# Altium PCB logi-cam-mt9v.PcbDoc
Units mil, origin at the board's own origin, x right, y up, seen from the top; angles counter-clockwise.
Board outline 1752 x 1238 mil, 4 copper layers (Top Layer, GND, VDD, Bottom Layer), stack 33.234 mil thick; 44 components, 39 nets, 162 pads, 131 vias.
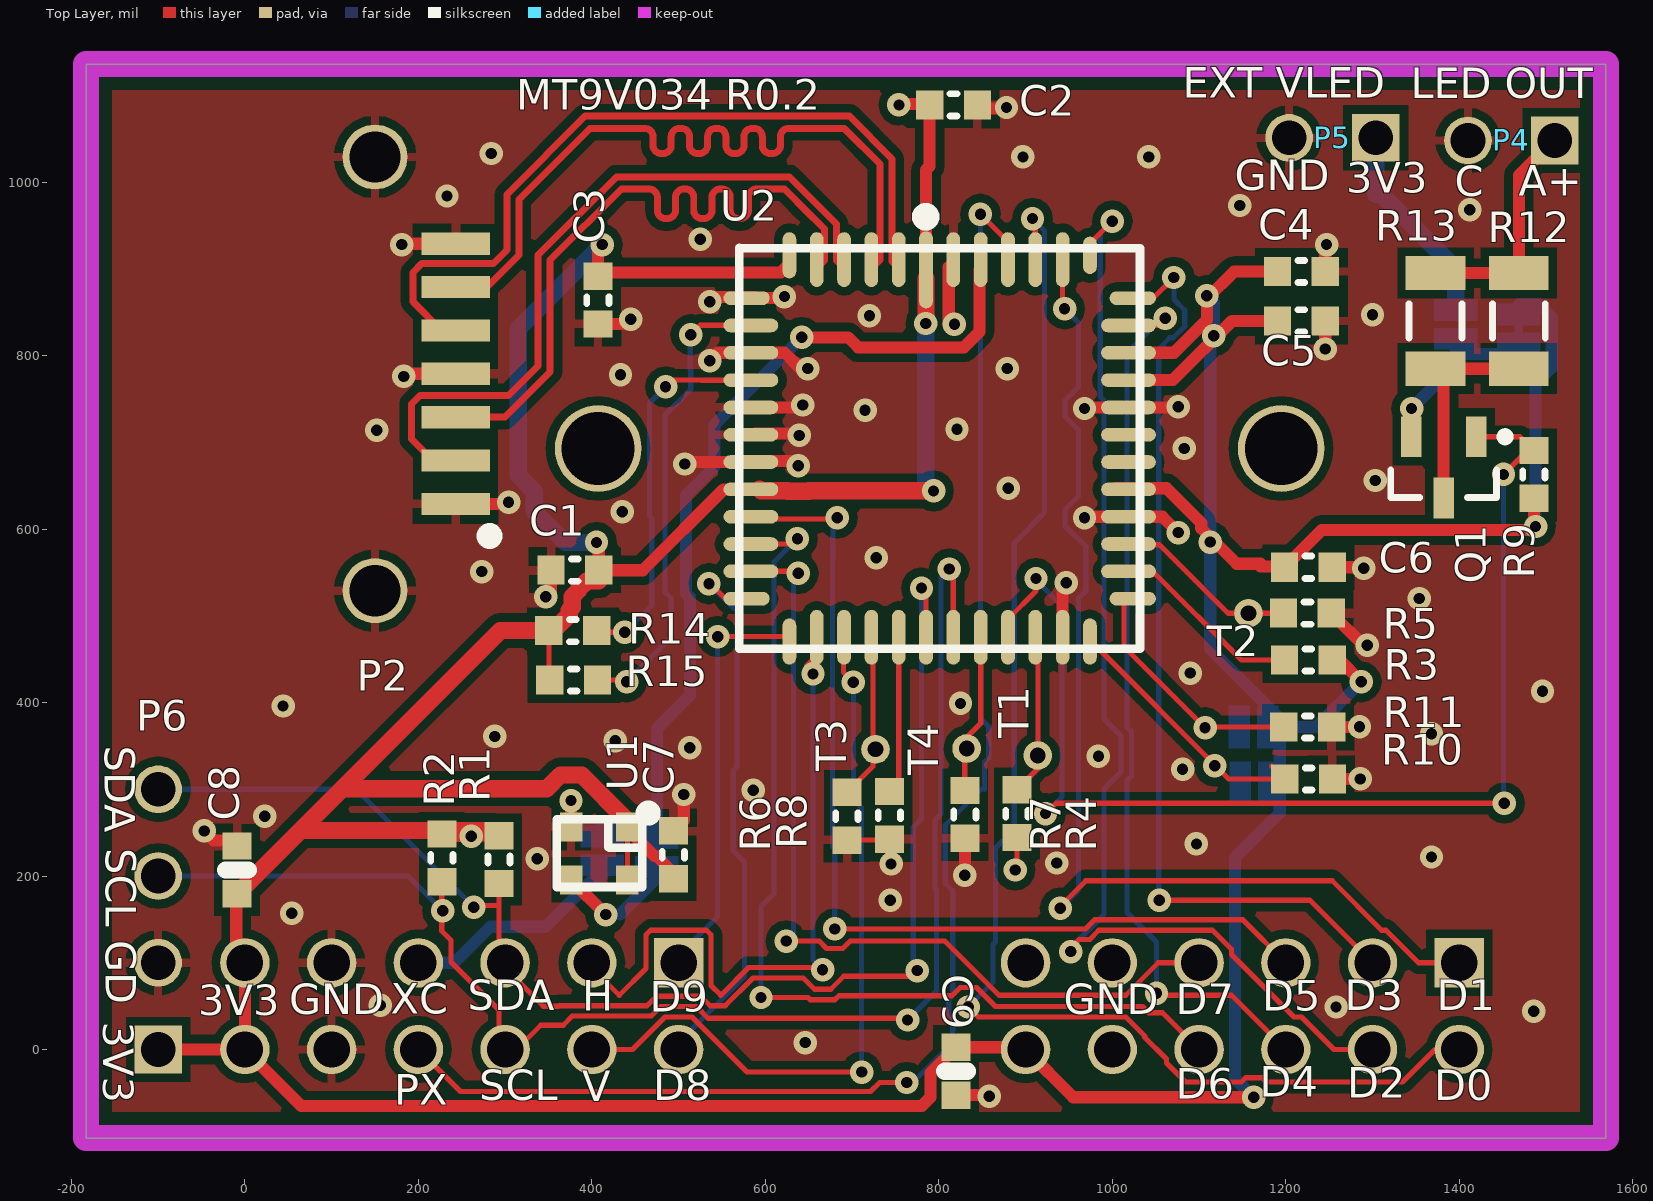
[diagram p0: Top Layer view]
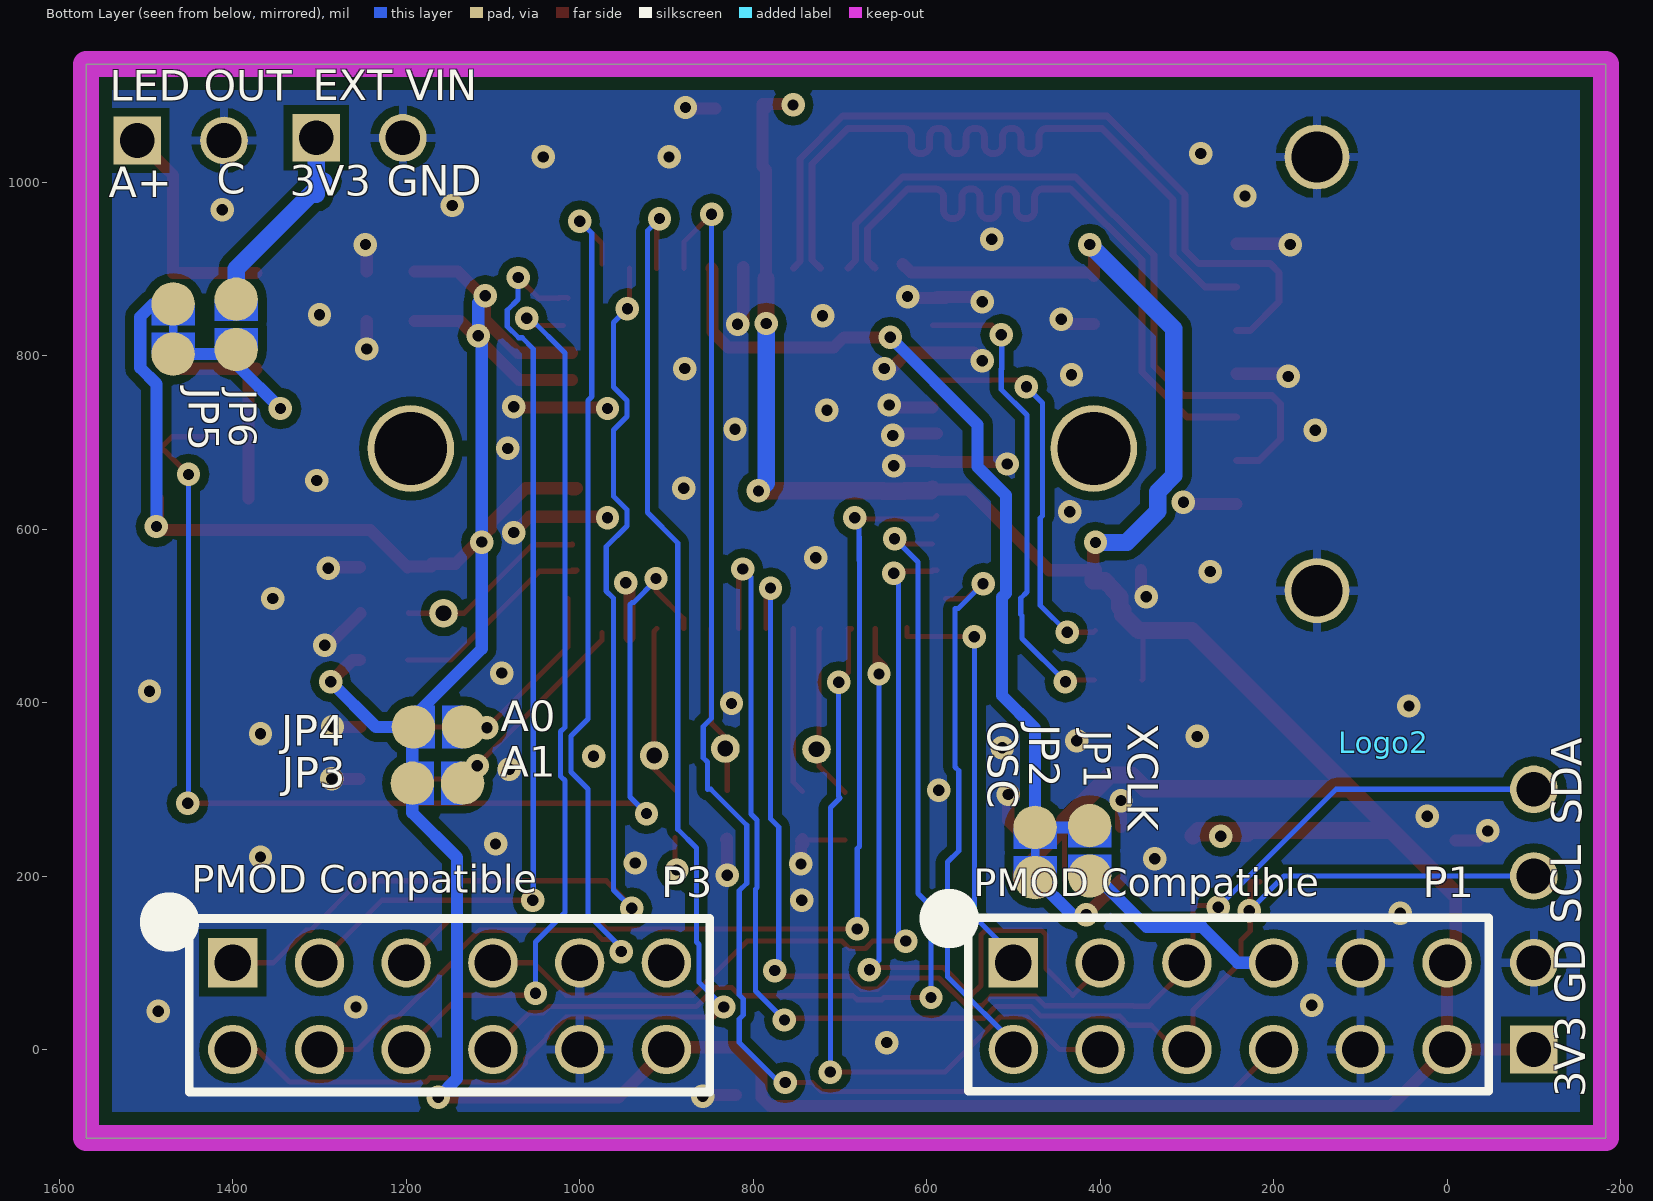
[diagram p1: Bottom Layer view, seen from below]
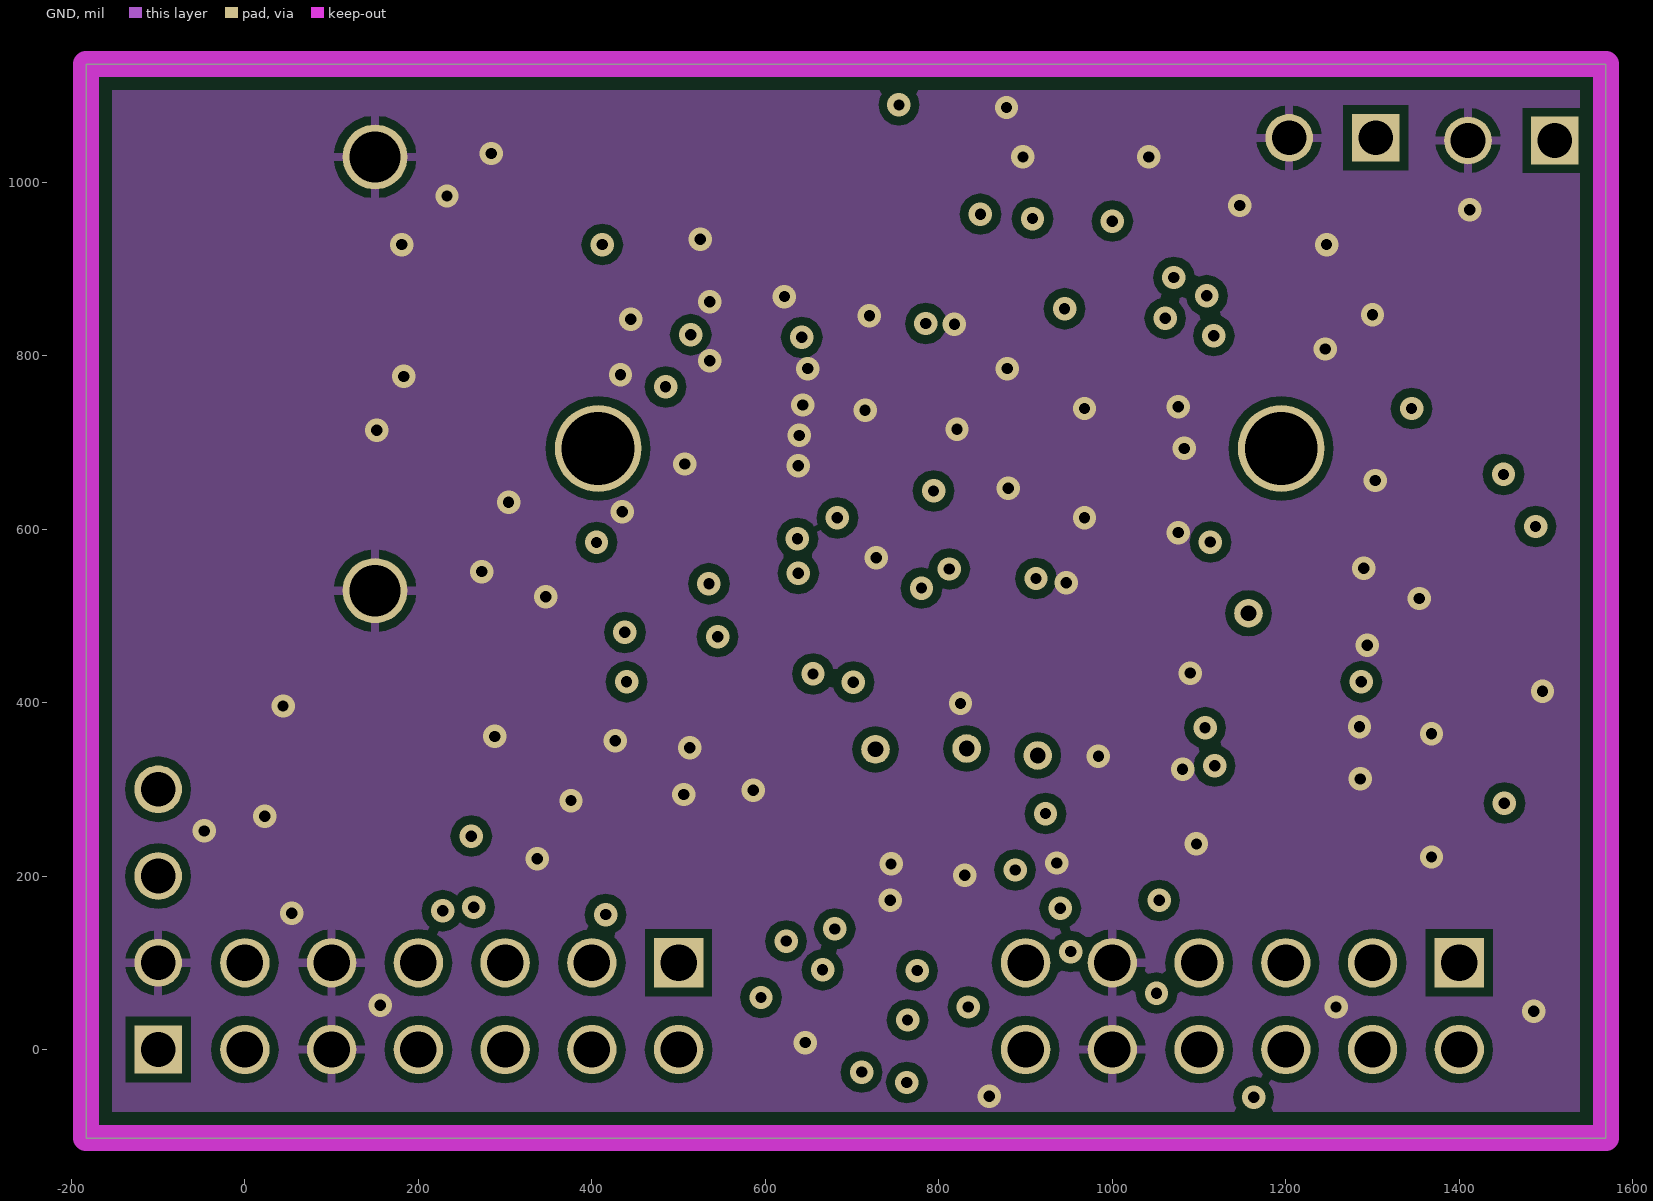
[diagram p2: GND]
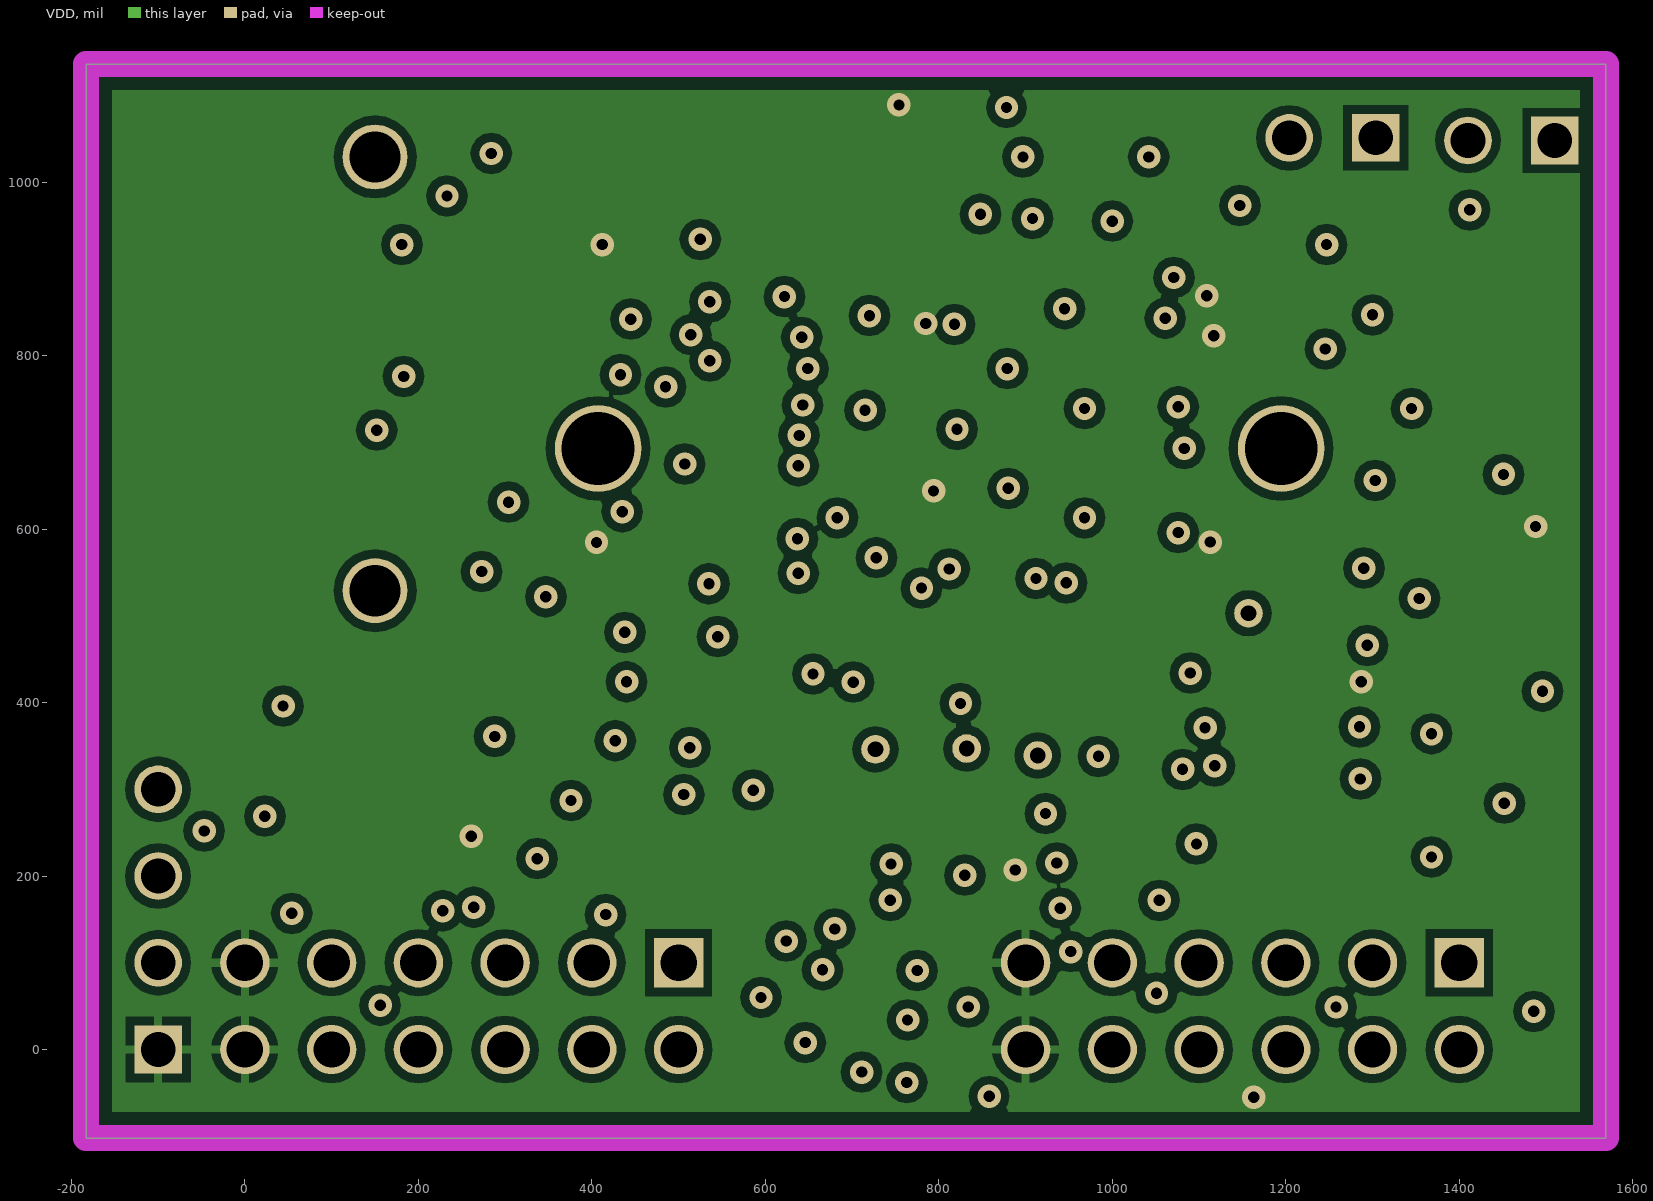
[diagram p3: VDD]
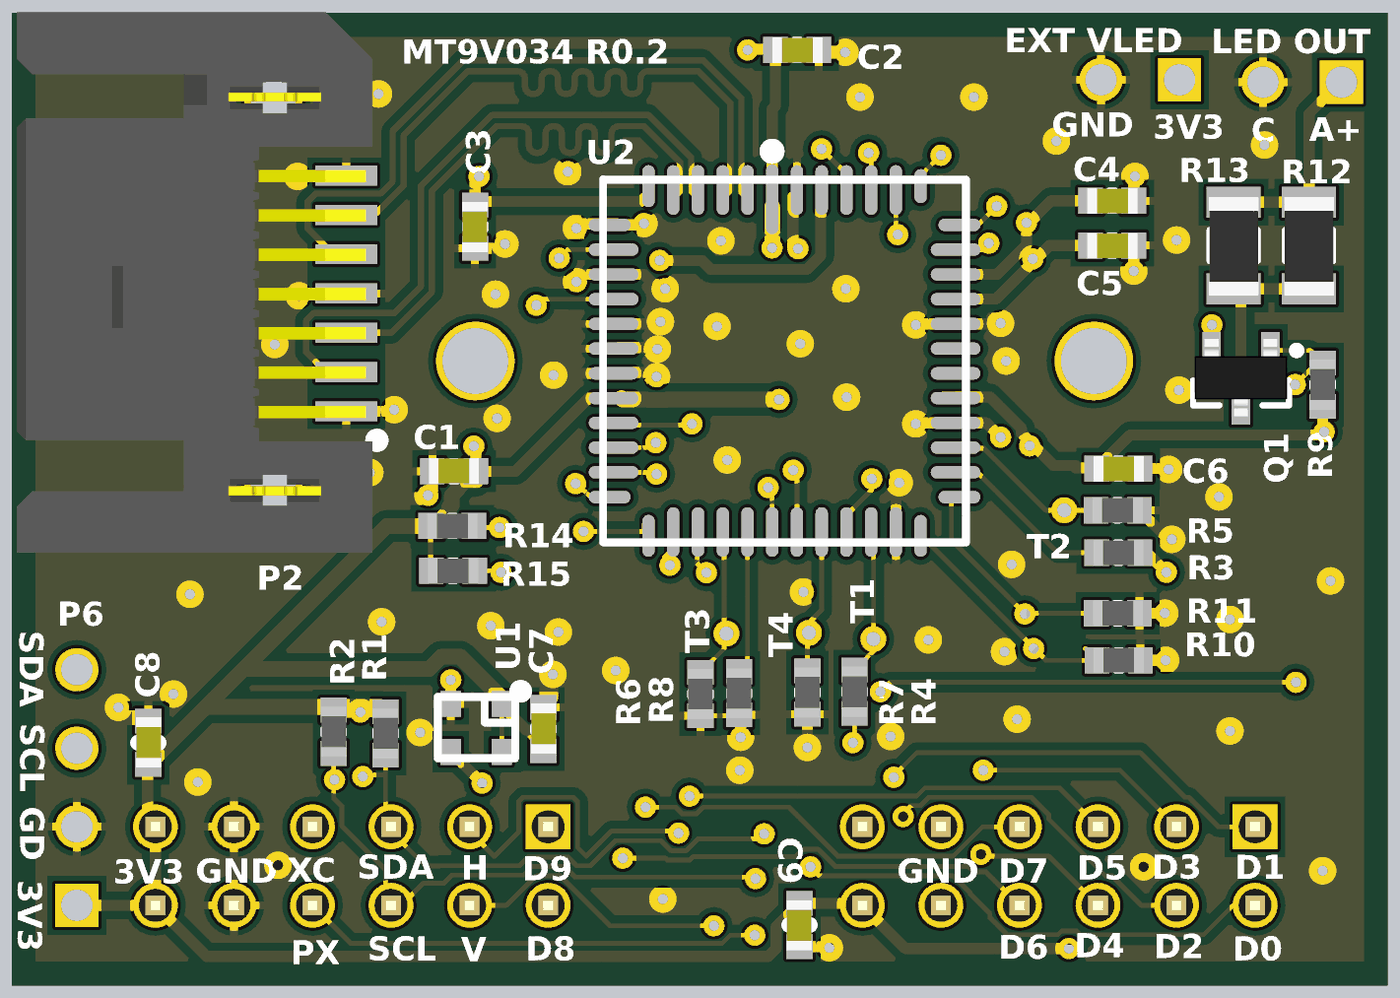
[diagram p4: 3D render of the assembled board from above, using the file's embedded part models]

## Layer stack, top to bottom
Top Solder: solder mask 0.4, Solder Resist, Dk 3.5
Top Layer: signal copper 1.4
Dielectric1: core 12.6, FR-4, Dk 4.8
GND: signal copper 1.417
Dielectric2: prepreg 5, Dk 4.2
VDD: signal copper 1.417
Dielectric3: core 10, Dk 4.2
Bottom Layer: signal copper 1.4
Bottom Solder: solder mask 0.4, Solder Resist, Dk 3.5

## Board outline
-183,-102 1569,-102 1569,1136 -183,1136

## Design rules (kind name [scope] priority, off if disabled: settings)
Clearance Keepout [onlayer('keep-out layer')] p1: gap=15
Clearance POLY_IN_BGA [(WithinRoom('BGA_INNER'))] p2: gap=6
Clearance POLY_TO_POLY [inpoly] p3: gap=10
Clearance [All] p4: gap=6
ComponentClearance [All] p1: gap=0 collisioncheckmode=3 verticalgap=0 showdistances=FALSE
DiffPairsRouting [All] p1: maxlimit=10 minlimit=6 mostfreqgap=6 toplayer_minwidth=6 toplayer_maxwidth=15 toplayer_prefwidth=8 midlayer1_minwidth=6 midlayer1_maxwidth=15 midlayer1_prefwidth=8 midlayer2_minwidth=6 midlayer2_maxwidth=15 midlayer2_prefwidth=8 bottomlayer_minwidth=6 bottomlayer_maxwidth=15 bottomlayer_prefwidth=8 maxuncoupledlength=500
FabricationTestPointUsage TestPointUsage [All] p1: valid=0 allowmultiple=FALSE
FabricationTestpoint Testpoint [All] p1: side=3 testpointundercomponent=TRUE minsize=40 maxsize=100 preferedsize=60 minholesize=0 maxholesize=40 preferedholesize=32 testpointgrid=1 allowsidetop=TRUE allowsidebottom=TRUE usegrid=TRUE gridtolerance=0.01
PlaneClearance [All] p1: clearance=10
PolygonConnect POLY_Q [(ObjectKind = 'Poly') And (Name = 'Q_POUR')] p1: connectstyle=Direct reliefconductorwidth=10 reliefentries=4 polygonreliefangle="90 Angle" airgapwidth=10
PolygonConnect "via connect" [isvia] p2: connectstyle=Direct reliefconductorwidth=10 reliefentries=4 polygonreliefangle="90 Angle" airgapwidth=10
PolygonConnect [All] p3: connectstyle=Relief reliefconductorwidth=10 reliefentries=4 polygonreliefangle="90 Angle" airgapwidth=10
RoutingVias [All] p1: holewidth=13 width=27 viastyle="Through Hole" minholewidth=13 minwidth=27 maxholewidth=28 maxwidth=50
SilkToSolderMaskClearance SilkscreenOverComponentPads [IsPad] p1: minsilkscreentomaskgap=10 clearancetoexposedcopper=TRUE
SolderMaskExpansion VIA [isvia and not(locked)] p1: expansion=-100
SolderMaskExpansion SolderMaskExpansion_1 [All] p2: expansion=4
UnpouredPolygon [All] p1: allowunpoured=FALSE
Width [All] p1: maxlimit=20 minlimit=6 preferedwidth=14
23 further rules are at their usual default settings.

## Classes and differential pairs
differential pair LVDS_COUT: +LVDS_COUT_P -LVDS_COUT_N
differential pair LVDS_DOUT: +LVDS_DOUT_P -LVDS_DOUT_N

## Components (designator, comment, footprint, x,y, rotation, side; value= is the part's Value field where it differs from the comment)
C1 ".1uF" C0603 380.39,552.61 r180 top
C2 ".1uF" C0603 817,1089 r0 top
C3 ".1uF" C0603 407,864 r270 top
C4 ".1uF" C0603 1218,897 r0 top
C5 ".1uF" C0603 1218,840 r0 top
C6 ".1uF" C0603 1226,556 r0 top
C7 ".1uF" C0603 493.96,224.5 r90 top
C8 "4.7uF" "C0603 - Marked" -9,207 r90 top
C9 "4.7uF" "C0603 - Marked" 820,-25 r270 top
JP1 "Solder Jumper" SOLDER_JUMPER 412.01,200.09 r270 bottom
JP2 "Solder Jumper-NC" SOLDER_JUMPER-NC 475.01,198.09 r270 bottom net-tie
JP3 "Solder Jumper" SOLDER_JUMPER 1135,307 r180 bottom
JP4 "Solder Jumper" SOLDER_JUMPER 1133.81,371.86 r180 bottom
JP5 "Solder Jumper-NC" SOLDER_JUMPER-NC 1468.69,859.69 r90 bottom net-tie
JP6 "Solder Jumper" SOLDER_JUMPER 1396,865 r90 bottom
Logo2 "Valent Logo 750" VALENTFX_750-SOLDERMASK-BOT 73,354 r270 bottom
P1 "2X6 .1\" HEADER MALE" "PMOD HEADER - Male Vertical" 500,100 r0 bottom locked
P2 "SATA - 67490-1220" "SATA - 67490-3220" 243,629 r270 top
P3 "2X6 .1\" HEADER MALE" "PMOD HEADER - Male Vertical" 1400,100 r0 bottom
P4 "Header2" "HEADER_2_40_100 THRU SIP" 1510,1048 r180 top
P5 "Header2" "HEADER_2_40_100 THRU SIP" 1303.83,1051 r180 top
P6 "Header4" "HEADER_4_40_100 THRU SIP - duplicate" -100,0 r90 top
Q1 "Si2347DS-T1-GE3" sot-23 1382,671 r270 top
R1 "10k" R0603 293,219 r270 top
R2 "10k" R0603 227,221 r270 top
R3 "10k" R0603 1226,449 r180 top
R4 "10k" R0603 890,272 r90 top
R5 "10k" R0603 1225,503 r180 top
R6 "10k" R0603 694,269 r90 top
R7 "10k" R0603 830,271 r90 top
R8 "10k" R0603 743,270 r90 top
R9 "10k" R0603 1486,663 r270 top
R10 "10k" R0603 1226.37,311.86 r0 top
R11 "10k" R0603 1225.37,371.86 r0 top
R12 "10/1206" R1206 1468.69,840 r90 top
R13 "10/1206" R1206 1372.69,840 r90 top
R14 "10k" R0603 378,483 r180 top
R15 "10k" R0603 379,426 r180 top
T1 "Test Point" "Tp 18-33" 914,339 r0 top
T2 "Test Point" "Tp 18-33" 1157,503 r0 top
T3 "Test Point" "Tp 18-33" 727,346 r90 top
T4 "Test Point" "Tp 18-33" 832,347 r0 top
U1 "ASDMB-50.000MHZ-LC-T" "ASDMB - osc" 440.96,256.5 r180 top
U2 "CAM - MT9V034" "CAM - MT9V034 - easier" 801,693 r0 top locked

## Footprints (in the part's own frame and the unit in brackets; to place one, negate y for a bottom-side part, rotate by r counter-clockwise, add the part's x,y. Pads: shape width x height; smd on the part's side, far side on the other; paste and mask are expansions set on the pad)
"ASDMB - osc" [mil] "oscillator ASDMB - osc footprint"
  rect 26x33 smd: 1(0,0) 2(64.96,0) 3(64.96,61.02) 4(0,61.02)
  silkscreen extent -26,-18 81,69, body extent -17,-9 81,69, height 30
C0603 [mm] "0603 Generic"
  rect 0.8x0.85 smd: 1(-0.7,0) 2(0.7,0)
  silkscreen extent -0.1,-0.33 0.1,0.33, body extent -0.8,-0.42 0.82,0.4, height 0.46
"C0603 - Marked" [mm] "0603 Generic"
  rect 0.8x0.85 smd: 1(-0.7,0) 2(0.7,0)
  silkscreen extent 0,-0.33 0,0.33, body extent -0.8,-0.42 0.82,0.4, height 0.46
"CAM - MT9V034 - easier" [mm] "QFN, 48-Leads, Body 11.43x11.43mm, Pitch 0.80mm, IPC High Density"
  oval 0.4x2.254 smd: 1(-0.4,5.229)
  oval 0.4x1.604 smd: 2(-1.2,5.529) 3(-2,5.529) 4(-2.8,5.529) 5(-3.6,5.529) 20(-3.6,-5.529) 21(-2.8,-5.529) 22(-2,-5.529) 23(-1.2,-5.529) 24(-0.4,-5.529) 25(0.4,-5.529) 26(1.2,-5.529) 27(2,-5.529) 28(2.8,-5.529) 29(3.6,-5.529) 44(3.6,5.529) 45(2.8,5.529) 46(2,5.529) 47(1.2,5.529) 48(0.4,5.529)
  oval 0.4x1.354 smd: 6(-4.4,5.654) 19(-4.4,-5.654) 30(4.4,-5.654)
  oval 1.354x0.4 smd: 7(-5.654,4.4) 18(-5.654,-4.4) 31(5.654,-4.4) 42(5.654,4.4)
  oval 1.604x0.4 smd: 8(-5.529,3.6) 9(-5.529,2.8) 10(-5.529,2) 11(-5.529,1.2) 12(-5.529,0.4) 13(-5.529,-0.4) 14(-5.529,-1.2) 15(-5.529,-2) 16(-5.529,-2.8) 17(-5.529,-3.6) 32(5.529,-3.6) 33(5.529,-2.8) 34(5.529,-2) 35(5.529,-1.2) 36(5.529,-0.4) 37(5.529,0.4) 38(5.529,1.2) 39(5.529,2) 40(5.529,2.8) 41(5.529,3.6)
  oval 0.4x1.1 smd: 43(4.4,5.654)
  round 2.54 hole 2.134: x(-10,0) x(10,0)
  silkscreen extent -5.86,-5.86 5.87,6.99, body extent -5.71,-5.71 5.72,5.71, height 2.3
"HEADER_2_40_100 THRU SIP" [mil]
  rect 55x55 hole 40: 1(0,0)
  round 55 hole 40: 2(100,0)
"HEADER_4_40_100 THRU SIP - duplicate" [mil]
  rect 55x55 hole 40: 1(0,0)
  round 55 hole 40: 2(100,0) 3(200,0) 4(300,0)
"PMOD HEADER - Male Vertical" [mil] "68021-212HLF"
  rect 57x57 hole 42: 1(0,0)
  round 57 hole 42: 2(-100,0) 3(-200,0) 4(-300,0) 5(-400,0) 6(-500,0) 7(0,100) 8(-100,100) 9(-200,100) 10(-300,100) 11(-400,100) 12(-500,100)
  body extent -550,-50 50,150, height 335
R0603 [mm] "0603 Generic"
  rect 0.8x0.85 smd: 1(-0.7,0) 2(0.7,0)
  silkscreen extent -0.1,-0.33 0.1,0.33, body extent -0.81,-0.41 0.81,0.41, height 0.46
R1206 [mm] "1206 Generic"
  rect 1x1.75 smd: 1(-1.4,0) 2(1.4,0)
  silkscreen extent -0.5,-0.77 0.5,0.77, body extent -1.62,-0.8 1.58,0.8, height 0.55
"SATA - 67490-3220" [mm] "Sata Data header 67490-3220 - verified pin nums on datasheet 1=gnd 2=tx+"
  round 1.9 hole 1.5: 1(-10.16,-2.36) 1(2.54,-2.36)
  rect 0.65x2 smd: 1(0,0) 2(-1.27,0) 3(-2.54,0) 4(-3.81,0) 5(-5.08,0) 6(-6.35,0) 7(-7.62,0)
  silkscreen extent 0.81,0.86 1.07,1.12, body extent -12.9,-10.66 4.57,0.84, height 4
SOLDER_JUMPER [mil]
  round 50 smd: 1(0,0) 2(-58,0)
  Top Layer region: 0.09,-24.99 -24.91,-24.99 -24.91,25.01 0.09,25.01
  Top Layer region: -32.91,-24.99 -57.91,-24.99 -57.91,25.01 -32.91,25.01
SOLDER_JUMPER-NC [mil]
  round 50 smd: 1(0,0) 2(-58,0)
  Top Layer region: 0.09,-24.99 -24.91,-24.99 -24.91,25.01 0.09,25.01
  Top Layer region: -32.91,-24.99 -57.91,-24.99 -57.91,25.01 -32.91,25.01
  Top Layer lines w10: 0,0 -50,0
sot-23 [mm] "SOT-23"
  rect 1.2x0.6 smd: 1(-0.9,0.95) 2(-0.9,-0.95) 3(0.9,0)
  silkscreen extent -1.02,-1.55 0.87,1.93, body extent -1.27,-1.5 1.23,1.5, height 1.07
"Tp 18-33" [mil]
  round 33 hole 18: 1(0,0)
VALENTFX_750-SOLDERMASK-BOT [mil]

## Part data
C1 C2 C3 C4 C5 C6 C7: library part "C0603 - C1608X7R1E104MT", ".10uF X7R 20% (MLCC) - SMD/SMT 0603 25volts"
C8 C9: library part "C0603 - GRM188R60J475KE19D", "4.7uF 6.3volts X5R 10% (MLCC) - SMD/SMT 0603"
JP1 JP2 JP3 JP4 JP5 JP6: "Solder/Configuration Jumper"
P1 P3: library part "P-MOD - PRPC006DAAN-RC", "CONN HEADER .100\" DUAL STR 12 POS"
P2: "SATA Data - 67490-1220"
P4 P5: "Header 2 pin"
P6: "Header 4 pin"
Q1: library part "PMOS - Si2347DS-T1-GE3", "MOSFET -30V .042Ohm@10V 5A P-Ch G-III"
R1 R2 R3 R4 R5 R6 R7 R8 R9 R10 R11 R14 R15: library part "R0603 - CRCW060310K0FKEA", "10k Thick Film Resistors - SMD 1/10watt 10Kohms 1%"
R12 R13: library part "R1206 - ERJ-8ENF3301V", "RES 3.3K OHM 1/4W 1% 1206 SMD"
T1 T2 T3 T4: library part "Test Point 2", "Test Point Smaller Symbol"
U1: "OSC MEMS 50.000 MHZ SMD"
U2: "SENSOR IMAGE VGA MONO 48-CLCC"

## Via types
v1: diameter 27, hole 13, Top Layer to Bottom Layer, 131 vias

## Nets (pads, with @x,y where several pads share a name; then routed paths per layer and width w, separated by ;. In a path a pad name is that pad's centre, name@x,y a point inside that pad or via, vN(x,y) a via of type N, cw(c..) or ccw(c..) an arc to the next point about the centre after c; other vN are vias at no path point)
3V3: C1.1 C2.1 C3.1 C4.1 C5.1 C6.1 C7.1 C8.1 C9.1 JP3.2 JP4.2 JP5.1 P1.6 P1.12 P3.6 P3.12 P6.1 R1.1 R2.1 R3.1 R4.1 R9.2 R14.2 R15.2 U1.1 U1.4 U2.1 U2.6 U2.14 U2.35 U2.39 U2.40 | length 7172.4
  Top Layer w6: R14.2 350.44,427 R15.2 ; U1.4 U1.1@440.96,254.19 ; v1(888,207) 888,216 889,217 890,216 R4.1
  Top Layer w14: P6.1 P1.12 ; C8.1@-10,179.44 -10,104 P1.6@-7,101 ; P1.6@-2,98 P1.6 P1.12 ; R2.1 229.56,246 v1(261,246) 261.56,246.56 R1.1 ; v1(405.39,584.61) 407.95,582.05 C1.1 458.61,552.61 551.76,645.76 U2.14@593.32,645.76 ; v1(412,928) 407,923 C3.1 411.39,895.95 618.13,895.95 U2.6@627.77,905.6 ; U1.1 440.96,254.19 471.84,223.31 474.15,223.31 493.96,203.5 C7.1 ; v1(754,1089) 755,1090 789.44,1090 C2.1@785.25,1085.81 ; U2.1@785.25,888.87 785.25,1014 789.44,1018.19 C2.1 ; U2.35@1008.68,645.76 1004.76,645.76 1003.43,647.08 1062.4,647.08 1102.5,606.98 1102.5,600.94 1143.44,560 1171,560 1171,557.03 1198.44,557.03 C6.1 1241.39,598.94 1483.94,598.94 v1(1488,603) 1486,605 R9.2 ; U2.39@1008.68,771.74 1008.94,772 1070,772 1138,840 C5.1 ; U2.40@1008.68,803.24 U2.40 1071.24,803.24 1109,841 v1@1109,865.56 ; v1(1109,869) v1@1109,865.56 ; v1(1163,-55) 955,-55 P3.12 897.44,2.56 C9.1 790.27,-27.17 790.27,-55.21 780.48,-65 65,-65 P1.12 ; C4.1 1140.44,897 v1@1109,865.56 ; R3.1 1262,449 v1(1287,424)
  Top Layer w20: C8.1 64,252.44 ; R1.1 287.12,252.44 64,252.44 ; C1.1 407.95,540.51 394.78,540.5 384.58,530.3 384.58,529.25 377.5,522.16 377.5,510.05 373.81,506.36 373.81,501.3 355.51,483 R14.2 294.56,483 112.28,300.72 ; U1.1 440.96,263.76 388.22,316.5 363.78,316.5 348,300.72 112.28,300.72 ; U2.14@593.32,645.76 595.08,644 625.28,644 625.78,643.5 650.22,643.5 650.72,644 v1(794,644) ; v1(785,837) 785.25,837.25 U2.1@785.25,888.87 ; 64,252.44 112.28,300.72
  Bottom Layer w14: v1(1109,869) 1117,861 v1(1117,823) 1113,819 v1(1113,585) 1113,462 1191.81,383.19 JP4.2 ; v1(1163,-55) 1141.5,-33.5 1141.5,221.51 1193,273.01 JP3.2 1193,370.67 JP4.2 ; v1(1287,424) 1234.86,371.86 JP4.2 ; JP5.1 1491.71,859.69 1506.7,844.7 1506.7,785.96 1488,767.26 v1(1488,603)
  Bottom Layer w20: v1(405.39,584.61) 369.39,584.61 333.5,620.5 333.5,643.22 315,661.72 315,831 v1(412,928) ; v1(785,837) 785,653 v1(794,644)
D0: P3.7 U2.45 | length 1635
  Top Layer w6: v1(834,49) 845.5,37.5 1015.53,37.5 1037.5,15.53 1037.5,14 1062.5,-11 1062.5,-15.53 1084.47,-37.5 1148.68,-37.5 1153.68,-32.5 1172.32,-32.5 1177.32,-37.5 1334.5,-37.5 1372,0 P3.7 ; v1(908,958) 911.24,954.76 U2.45 U2.45@911.24,900.68
  Bottom Layer w6: v1(834,49) 862.5,77.5 862.5,121.03 865.5,124.03 865.5,232.5 887,254 887,584 922,619 922,944 v1(908,958)
D1: P3.1 U2.44 | length 1300
  Top Layer w6: v1(940,163) 940,165 969.5,194.5 1253.5,194.5 1310.5,137.5 1315.53,137.5 1353.03,100 P3.1 ; U2.44@942.73,900.68 942.73,856.27 v1(945,854)
  Bottom Layer w6: v1(940,163) 961,184 961,520.18 969.5,528.68 969.5,579.68 945.5,603.68 945.5,622.32 961,637.82 961,714.18 945.5,729.68 945.5,748.32 961,763.82 961,838 v1(945,854)
D2: P3.8 U2.43 | length 1362.9
  Top Layer w6: v1(952,112.96) 952,117 962,127 973.97,127 984.47,137.5 1115.53,137.5 1137.5,115.53 1137.5,109.47 1209.47,37.5 1217.95,37.5 1255.45,0 P3.8 ; U2.43@974.23,905.6 974.23,929.23 v1(1000,955)
  Bottom Layer w6: v1(952,112.96) 952,117 990.5,155.5 990.5,300.5 1010,320 1010,361.5 990.5,381 990.5,748.32 986,752.82 986,941 v1(1000,955)
D3: P3.2 U2.42 | length 1081.5
  Top Layer w6: U2.42@1013.6,866.23 1014.37,867 U2.42@1023.6,867 ; U2.42 1047.23,866.23 v1(1071,890) ; v1(1054,172) 1228,172 P3.2
  Bottom Layer w6: v1(1054,172) 1053.5,172.5 1053.5,807.68 1066.32,820.5 1070.32,820.5 1083.5,833.68 1083.5,852.32 1071,864.82 v1(1071,890)
D4: P3.9 U2.41 | length 1038.5
  Top Layer w6: U2.41 1052.73,834.73 v1(1061,843) ; v1(1051,65) 1053.5,62.5 1137.5,62.5 P3.9
  Bottom Layer w6: v1(1051,65) 1051,124 1017,158 1017,310.03 1022,315.03 1022,366.47 1017,371.47 1017,803 1057,843 v1(1061,843)
D5: P3.3 U2.15 | length 1145.7
  Top Layer w6: U2.15@588.08,615.58 592.16,611.5 681.5,611.5 v1(683,613) ; v1(680,139) 969,139 979.5,149.5 1150.5,149.5 P3.3
  Bottom Layer w6: 677.5,590.5 677.5,234 680,231.5 v1(680,139) ; 678,564 678,608 v1(683,613)
D6: P3.10 U2.16 | length 1134.1
  Top Layer w6: U2.16@593.32,582.76 630.76,582.76 v1(637,589) ; v1(595,60) 649.21,60 651.71,57.5 680.29,57.5 684.79,62 815.18,62 824.68,71.5 843.32,71.5 865.32,49.5 1034.68,49.5 1041.68,42.5 1057.5,42.5 P3.10
  Bottom Layer w6: v1(595,60) 595,165 610,180 610,562 v1(637,589)
D7: P3.4 U2.17 | length 1005.1
  Top Layer w6: U2.17@588.08,552.59 U2.17@593.32,552.59 ; U2.17@593.32,551.27 635.73,551.27 v1(638,549) ; v1(624,125) 662.18,125 670.68,116.5 689.32,116.5 697.82,125 806.79,125 869.29,62.5 1015.53,62.5 1053.03,100 P3.4
  Bottom Layer w6: v1(624,125) 632.5,133.5 632.5,543.5 v1(638,549)
D8: P1.7 U2.18 | length 644
  Top Layer w6: v1(535,537) 537,537 554.23,519.77 U2.18
  Bottom Layer w6: P1.7@493,1 576,84 576,216.06 563,229.06 563,321.38 567.5,325.88 567.5,508.5 563.5,508.5 v1(535,537)
D9: P1.1 U2.19 | length 484.7
  Top Layer w6: v1(545,476) 622.53,476 U2.19@622.53,486.65
  Bottom Layer w6: P1.1@493,101 545,153 v1(545,476)
EXT_PWR: JP6.1 P5.1 | length 242.8
  Bottom Layer w20: 1295,1001 1396,900 JP6.1 ; 1303.83,986 P5.1
GND: C1.2 C2.2 C3.2 C4.2 C5.2 C6.2 C7.2 C8.2 C9.2 P1.5 P1.11 P2.1 P2.4 P2.7 P3.5 P3.11 P4.2 P5.2 P6.2 R5.1 R6.1 R7.1 R8.1 R10.2 R11.2 U1.2 U2.7 U2.9 U2.11 U2.12 U2.13 U2.29 U2.34 U2.38 U2.48 | length 1628.6
  Top Layer w6: R6.1 742,241.44 R8.1
  Top Layer w14: v1(-47,252) -36,241 C8.2@-10,241 ; v1(181,928) 182,929 P2.7 ; v1(183,776) 186,779 P2.4 ; P2.1@243,629 302,629 v1(304,631) ; v1(347,522) 350.79,522 351.79,521 352.84,522.05 C1.2 ; U1.2 v1(376,287) ; C3.2 439.44,836.44 v1(445,842) ; C7.2 506,264.1 v1(506,294) ; v1(507,675) 509.25,677.25 U2.13@593.32,677.25 ; v1(536,794) 545.24,803.24 U2.9 622.29,803.24 640.52,785 v1(649,785) ; v1(536,862) 541.55,867.55 U2.7@588.08,867.55 ; U2.7 620.23,866.23 v1(622,868) ; U2.13@588.08,678.57 632.43,678.57 v1(638,673) ; U2.12@588.08,710.07 636.93,710.07 v1(639,708) ; U2.11@593.32,740.24 640.24,740.24 v1(643,743) ; R8.1 745,240.44 742,237.44 745,234.44 v1(745,214) ; U2.48@811.5,902 811.5,836.5 812,836 v1(818,836) ; C9.2 856.56,-52.56 v1(858,-54) ; v1(830,201) 830,241.44 831,242.44 R7.1 ; C2.2@843.56,1085 877,1085 v1(878,1086) ; U2.29 942.73,533.73 v1(947,538) ; v1(968,613) 969.26,614.26 1057.74,614.26 v1(1076,596) ; v1(968,739) 969.24,740.24 1075.24,740.24 v1(1076,741) ; v1(1245.56,807.56) C5.2 ; C4.2 1245.56,926.56 v1(1247,928) ; R5.1 1289.56,466 v1(1294,466) ; R11.2 1284.86,371.86 v1(1285,372) ; C6.2 1289,556 v1(1290,555) ; R10.2 1285.86,311.86 v1(1286,312)
  other v1: 646,8 1486,44 1258,49 156,51 54,157 744,172 936,215 337,220 1368,222 1097,237 23,269 586,299 1081,323 984,338 513,348 427,356 288,361 1368,364 44,396 825,399 1496,413 1090,434 1354,520 273,551 728,567 435,620 880,647 1303,656 1083,693 152,714 821,715 715,737 433,778 879,785 720,846 1300,847 525,934 1412,968 1147,973 233,984 897,1029 1042,1029 284,1033
HSYNC: P1.2 U2.20 | length 837.9
  Top Layer w6: P1.2@393,101 431.5,62.5 462.5,93.5 462.5,132.23 467.77,137.5 532.23,137.5 537.5,132.23 537.5,73.71 548.71,62.5 580.71,94.5 663.5,94.5 v1(666,92) ; v1@648,443 U2.20@659.27,454.27 ; v1(655,433) 659.27,437.27 U2.20@659.27,454.27 ; U2.20@659.27,485.32 U2.20@659.27,454.27
  Bottom Layer w6: v1(655,433) 655,103 v1(666,92)
LED_DRIVE: Q1.1 R9.1 U2.27 | length 1396.4
  Top Layer w6: U2.27@879.74,485.32 880,485.58 880,496.65 912,528.65 v1(912,543) ; v1(923,272) 935,284 v1(1452,284) ; Q1.1 1470.13,706.43 R9.1 1478.56,690.56 v1(1451,663)
  Bottom Layer w6: v1(912,543) 912,541.18 937.68,515.5 939.5,515.5 942,513 942,291 v1(923,272) ; v1(1451,663) 1451,285 v1(1452,284)
LVDS_COUT_N: P2.5 U2.2 | length 911.2
  Top Layer w8: P2.5 226.69,829 193.63,862.06 193.63,895.94 203.9,906.2 286.51,906.2 292.37,912.06 292.37,912.17 302,921.8 302,985.8 392.2,1076 696.8,1076 746,1026.8 746,908.43 U2.2@753.76,900.68
LVDS_COUT_P: P2.6 U2.3 | length 910.8
  Top Layer w8: P2.6 279,879 292.2,892.2 292.31,892.2 306.37,906.26 306.37,906.37 316,916 316,980 398,1062 461,1062 461.05,1062 cw(c461.05,1052.55) 470.5,1052.55 470.5,1042.45 ccw(c479.95,1042.45) 479.95,1033 482.05,1033 ccw(c482.05,1042.45) 491.5,1042.45 491.5,1052.55 cw(c500.95,1052.55) 500.95,1062 503.05,1062 cw(c503.05,1052.55) 512.5,1052.55 512.5,1042.45 ccw(c521.95,1042.45) 521.95,1033 524.05,1033 ccw(c524.05,1042.45) 533.5,1042.45 533.5,1052.55 cw(c542.95,1052.55) 542.95,1062 545.05,1062 cw(c545.05,1052.55) 554.5,1052.55 554.5,1042.45 ccw(c563.95,1042.45) 563.95,1033 566.05,1033 ccw(c566.05,1042.45) 575.5,1042.45 575.5,1052.55 cw(c584.95,1052.55) 584.95,1062 587.05,1062 cw(c587.05,1052.55) 596.5,1052.55 596.5,1042.45 ccw(c605.95,1042.45) 605.95,1033 608.05,1033 ccw(c608.05,1042.45) 617.5,1042.45 617.5,1052.55 cw(c626.95,1052.55) 626.95,1062 628,1062 691,1062 732,1021 732,910.42 U2.3@722.26,900.68
LVDS_DOUT_N: P2.3 U2.5 | length 832.8
  Top Layer w8: P2.3 300,729 352,781 352,910 434,992 444,992 454.5,992 466.05,992 cw(c466.05,982.55) 475.5,982.55 475.5,967.45 ccw(c484.95,967.45) 484.95,958 487.05,958 ccw(c487.05,967.45) 496.5,967.45 496.5,982.55 cw(c505.95,982.55) 505.95,992 508.05,992 cw(c508.05,982.55) 517.5,982.55 517.5,967.45 ccw(c526.95,967.45) 526.95,958 529.05,958 ccw(c529.05,967.45) 538.5,967.45 538.5,982.55 cw(c547.95,982.55) 547.95,992 550.05,992 cw(c550.05,982.55) 559.5,982.55 559.5,967.45 ccw(c568.95,967.45) 568.95,958 571.05,958 ccw(c571.05,967.45) 580.5,967.45 580.5,982.55 cw(c589.95,982.55) 589.95,992 601.5,992 622,992 629.42,984.58 643,971 668,946 668,909.41 U2.5@659.27,900.68
LVDS_DOUT_P: P2.2 U2.4 | length 852.1
  Top Layer w8: P2.2 217,679 192,704 192,744.31 201.69,754 304,754 338,788 338,915.8 428.2,1006 627.8,1006 682,951.8 682,909.44 U2.4@690.76,900.68
NetJP1_2: JP1.2 JP2.2 U2.47 | length 988.5
  Top Layer w14: v1(642,821) 695.5,821 707,809.5 828.98,809.5 847,827.52 847,899.43 U2.47@848.24,900.68
  Bottom Layer w14: JP1.2 414.01,256.09 JP2.2@471.01,256.09 ; JP2.2 475.01,370.01 513,408 513,521.52 508.5,526.02 508.5,639.02 541.27,671.79 541.27,720.27 v1(642,821)
NetJP3_1: JP3.1 R10.1 U2.30 | length 320.8
  Top Layer w6: U2.30@974.23,480.4 974.23,471.95 1134.32,311.86 R10.1 R10.1@1183.67,327
  other v1: 1118,327
NetJP4_1: JP4.1 R11.1 U2.31 | length 278.6
  Top Layer w6: U2.31@1013.6,519.77 1013.6,464.4 v1(1107,371) 1107.86,371.86 R11.1
NetJP5_2: JP5.2 JP6.2 Q1.2 | length 164
  Bottom Layer w14: v1(1345,739) 1396,790 JP6.2 1401.31,801.69 JP5.2
NetP4_1: P4.1 R12.2 R13.2 | length 265.5
  Top Layer w14: R13.2 R12.2 1468.69,1007.85 1477.52,1016.69 P4.1@1508.83,1048
NetQ1_3: Q1.3 R12.1 R13.1 | length 249.2
  Top Layer w14: Q1.3 1382,775.57 R13.1 R12.1
NetR3_2: R3.2 U2.32 | length 243.2
  Top Layer w6: U2.32@1008.68,552.59 1003.43,552.59 1004.76,551.27 1046.73,551.27 1149,449 R3.2
NetR4_2: R4.2 T1.1 U2.28 | length 197.3
  Top Layer w6: R4.2 914.5,324.06 914.5,482.06 U2.28@911.24,485.32
NetR5_2: R5.2 T2.1 U2.33 | length 222.7
  Top Layer w6: U2.33@1008.68,582.76 1008.68,582 1054.44,582 1133.44,503 R5.2 R5.2@1197.44,503.44
NetR6_2: R6.2 T3.1 U2.22 | length 201.9
  Top Layer w6: R6.2 724,326.56 724,483.58 U2.22@722.26,485.32
NetR7_2: R7.2 T4.1 U2.26 | length 194.3
  Top Layer w6: R7.2 830,345 T4.1 832,359.76 848.24,376 U2.26@848.24,485.32
NetR8_2: R8.2 U2.23 | length 192.2
  Top Layer w6: R8.2 753.76,308.31 U2.23@753.76,485.32
NetR14_1: R14.1 U2.10 | length 449.7
  Top Layer w6: R14.1 407.56,481 v1(438,481) ; v1(485,764) 492.74,771.74 526.44,771.74 526.68,771.5 593.08,771.5 U2.10@593.32,771.74
  Bottom Layer w6: v1(438,481) 469,512 469,612.63 466.3,615.33 466.3,745.3 v1(485,764)
NetR15_1: R15.1 U2.8 | length 555.1
  Top Layer w6: R15.1 438,426 v1(440,424) ; v1(514,824) 525,835 593.06,835 U2.8@593.32,834.73
  Bottom Layer w6: v1(440,424) 490,474 490,500.18 491.5,501.68 491.5,520.32 484.5,527.32 484.5,731.5 514,761 514,784.18 513.5,784.68 513.5,823.5 v1(514,824)
OSC_CLK: JP2.1 U1.3 | length 116.5
  Top Layer w14: U1.3 v1(415.89,155.59)
  Bottom Layer w14: 432.51,155.59 JP2.1
PCLK: P1.10 U2.46 | length 1720.4
  Top Layer w6: P1.10 248.5,-48.5 721.32,-48.5 731.82,-38 v1(763,-38) ; v1(848,963) 879.74,931.26 U2.46@879.74,900.68
  Bottom Layer w6: v1(763,-38) 770,-38 816,8 816,35.18 811.5,39.68 811.5,58.32 816,62.82 816,183.18 807.5,191.68 807.5,258.5 849,300 ; v1(848,963) 848,382 857.5,372.5 857.5,336.44 852.5,331.44 852.5,300
SCL: P1.9 P6.3 R2.2 U2.25 | length 1684.3
  Top Layer w6: R2.2@215.94,193.44 R2.2 227,136.53 237.5,126.03 237.5,101.05 293,45.55 293,1 314,1 341,28 366.97,28 377.47,38.5 468.5,38.5 479.5,49.5 520.5,49.5 534,36 v1@764,36 ; v1(812,554) 816.75,549.25 U2.25@816.75,485.32
  Bottom Layer w6: P6.3 188,200 v1(228,160) ; v1(764,34) 797.5,67.5 797.5,184.71 795.5,186.71 795.5,264.56 802.5,271.56 802.5,544.5 v1(812,554)
SDA: P1.3 P6.4 R1.2 U2.24 | length 1574.5
  Top Layer w6: v1(264,164) 266,166 293,166 ; R1.2 293,166 ; P1.3@297,97 344,50 361.5,50 362,50.5 463.53,50.5 474.53,61.5 525.47,61.5 536.47,50.5 553.68,50.5 585.68,82.5 643.68,82.5 656.68,69.5 675.32,69.5 690.32,84.5 768.5,84.5 v1(775,91) ; P1.3 293,107 293,166 ; v1(780,532) 785.25,526.75 U2.24@785.25,485.32
  Bottom Layer w6: P6.4 128,300 v1(264,164) ; v1(775,91) 770.5,95.5 770.5,256.53 780,266.03 v1(780,532)
VSYNC: P1.8 U2.21 | length 885
  Top Layer w6: P1.8@393,1 P1.8@397,-3 ; P1.8 446.97,0 484.47,37.5 515.53,37.5 579.03,-26 v1(711,-26) ; U2.21@690.76,485.32 686.84,485.32 690,482.17 690,435 v1(701.5,423.5)
  Bottom Layer w6: v1(701.5,423.5) 701.5,291.56 700,290.06 711,279.06 v1(711,-26)
XCLK: JP1.1 P1.4 | length 253.5
  Bottom Layer w14: P1.4 241.31,100 282.81,141.5 346.48,141.5 405.07,200.09 JP1.1
pads on no net: U2.36 U2.37 U2.x

## Polygon pours and split planes (outlines as drawn)
3V3 on VDD "VDD" (solid, remove dead copper, pour order 13): -171,-103 1529,-103 1559,-103 1559,1128 -171,1128
GND on Bottom Layer "GND_BOT" (solid, remove dead copper, pour order 14): -171,-103 1529,-103 1559,-103 1559,1124 -171,1124
GND on GND "GND" (solid, remove dead copper, pour order 11): -171,-103 1529,-103 1559,-103 1559,1129 -171,1129
GND on Top Layer "GND_TOP" (solid, pour order 10): -171,-103 1529,-103 1559,-103 1559,1122 -171,1122

## Keep-outs
Keep-Out Layer:
  the board outline again, w30

## Silkscreen, mask and mechanical layers (free items; w line width, h text height)
Top Overlay:
  text "EXT VLED" at 1081,1086 h60
  text "LED OUT" at 1344,1085 h60
  text "MT9V034 R0.2" at 313,1072 h60
  text "GND" at 1141,979 h60
  text "3V3" at 1270,976 h60
  text "A+" at 1468.69,973 h60
  text "C" at 1395,972 h60
  text "SDA" at -173,350 h60 r270
  text "SCL" at -172,232 h60 r270
  text "GD" at -172,126 h60 r270
  text "SDA" at 257,34 h60
  text "D3" at 1268,34 h60
  text "D1" at 1374.13,33.63 h60
  text "H" at 389,33 h60
  text "D5" at 1173,33 h60
  text "3V3" at -175,32 h60 r270
  text "D9" at 467,32 h60
  text "XC" at 168,30 h60
  text "GND" at 51,29 h60
  text "GND" at 944,29 h60
  text "D7" at 1073,29 h60
  text "3V3" at -54,28 h60
  text "D4" at 1170,-66 h60
  text "D2" at 1271,-67 h60
  text "D6" at 1073,-68 h60
  text "SCL" at 270,-70 h60
  text "D8" at 471,-70 h60
  text "D0" at 1371,-70 h60
  text "V" at 389,-71 h60
  text "PX" at 172,-75 h60
Bottom Overlay:
  circle w60: c1472.88,147 r4.12
  circle w60: c574,151 r4.12
  lines w10: -48,-48 52,-48 552,-48 552,152 -48,152 -48,-48 ; 850,-49 850,151 1450,151 1450,-49 850,-49
  text "EXT VIN" at 1308,1083 h60
  text "LED OUT" at 1542,1082 h60
  text "C" at 1418.17,975 h60
  text "GND" at 1222.17,973 h60
  text "3V3" at 1334.17,973 h60
  text "A+" at 1543.17,971 h60
  text "OSC" at 541,379 h60 r90
  text "XCLK" at 380,376 h60 r90
  text "A0" at 1091,355.18 h60
  text "A1" at 1091,303 h60
  text "SDA" at -167,259 h60 r270
  text "PMOD Compatible" at 1447,170 h55
  text "PMOD Compatible" at 546,166 h55
  text "SCL" at -166,145 h60 r270
  text "GD" at -171,53 h60 r270
  text "3V3" at -171,-55 h60 r270
Bottom Solder:
  text "V2014.09.15" at 167,944 h80 r90
  text "LOGI-CAM-LVDS- R0.2" at 90,911 h60 r90
Mechanical 2:
  lines w10: -319.13,-42.89 -300,-103.17 ; -310,-103.03 -290,-103.32 ; -300.87,1216.3 -280,1276 ; -295.6,200.57 -300,-103.17 ; -290,1276.15 -270,1275.85 ; -284.4,972.25 -280,1276 ; -279.13,-43.47 -300,-103.17 ; -260.87,1215.72 -280,1276 ; -159.15,-192.18 -159.02,-172.18 ; -99.22,-202.57 -159.09,-182.18 ; -98.96,-162.57 -159.09,-182.18 ; 312.08,-185.22 -159.09,-182.18 ; 1073.83,-190.14 1545,-193.17 ; 1484.87,-212.79 1545,-193.17 ; 1485.13,-172.79 1545,-193.17 ; 1544.94,-203.17 1545.06,-183.17
  text "1379.319 (mil)" at -259.46,210.05 h60 r89.17
  text "1704.121 (mil)" at 321.85,-221.28 h60 r359.63
Mechanical 3:
  lines w20: -2814.96,558.83 -414.96,558.83 ; -2814.96,2658.83 6135.04,2658.83
  text "PCB Fabrication Notes" at -2794.96,2778.83 h150
  text "Unless otherwise specified, all dimensions are in inches" at -2826,2458.83 h100
  text "Overall Dimension:  1.7\"  x  1.4\"" at -2826,2358.83 h100
  text "Finished Thickness:  .062\"" at -2826,2258.83 h100
  text "Layer Count: 2" at -2826,2158.83 h100
  text "Min Thru Hole: 13 mil" at -2826,2069.83 h100
  text "Annular Ring: 7 mil" at -2826,1976.83 h100
  text "Min Trace/Space: 6 mil" at -2826,1881.83 h100
  text "Drill Count:" at -2826,1775.83 h100
  text ".hole_Count" at -2230.96,1775.83 h100
  text "PAD Count:" at -2826,1675.83 h100
  text ".pad_Count" at -2230.96,1675.83 h100
  text "Component Count:" at -2826,1575.83 h100
  text ".Component_Count" at -2030.96,1575.83 h100
  text "Via Count:" at -2826,1475.83 h100
  text ".Via_Count" at -2230.96,1475.83 h100
  text "Plating: Gold ENIG" at -2826,1254.56 h100
  text "Solder Mask:  Black" at -2826,1154.83 h100
  text "Legend:  White Non-Conductive Ink LPI Process" at -2826,1054.83 h100
  text "RS274-X Gerber Format, 2.5 Leading Zeros Suppressed" at -2826,954.83 h100
  text "Excellon Drill Format, 2.5 Trailing Zeros Suppressed" at -2826,854.83 h100
  text "Layer Details" at -2814.96,658.83 h100
  text "4-Layer Stackup" at -2014.96,658.83 h100
  text "POLARITY" at -1114.96,658.83 h100
  text ".GTL - Top Copper" at -2814.96,458.83 h100
  text "POSITIVE" at -1114.96,458.83 h100
  text ".G1 - Inner Copper (Ground)" at -2814.96,358.83 h100
  text "POSITIVE" at -1114.96,358.83 h100
  text ".G2 - Inner Copper (VDD)" at -2814.96,258.83 h100
  text "POSITIVE" at -1114.96,258.83 h100
  text ".GBL - Bottom Copper" at -2814.96,158.83 h100
  text "POSITIVE" at -1116,158.37 h100
  text ".GTO - Top Silkscreen" at -2814.96,-41.17 h100
  text ".GBO - Bottom Silkscreen" at -2814.96,-141.17 h100
  text ".GTP - Top Solder Paste" at -2814.96,-241.17 h100
  text ".GBP - Bottom Solder Paste" at -2814.96,-341.17 h100
  text ".GTS -  Top Solder Mask" at -2814.96,-441.17 h100
  text ".GBS - Bottom Solder Mask" at -2814.96,-541.17 h100
  text ".GKO - Board Outline" at -2814.96,-641.17 h100
  text ".GM1 - 3D Part Bodies - System" at -2814.96,-741.17 h100
  text ".GM2 - Board Dimensions" at -2814.96,-841.17 h100
  text ".GM3 - Single Board Fabrication Notes" at -2814.96,-941.17 h100
  text ".GM4 - Single Board Score/Tab Route" at -2814.96,-1041.17 h100
  text ".GM13 - 3D Body Alt" at -2814.96,-1141.17 h100
  text ".GM15 - Assembly Outlines - Top" at -2814.96,-1241.17 h100
  text ".GM20 - Panel Dimensions" at -2814.96,-1341.17 h100
  text ".GM21 - Panel Score/Tab Route" at -2814.96,-1441.17 h100
  text ".GM22 - Panel Dimensions" at -2814.96,-1541.17 h100
  text ".TXT/.DRL - NC-Drill" at -2814.96,-1741.17 h100
Mechanical 16:
  lines w5: -5016,-1389 -4816,-1389 ; -5016,1386 -4816,1386 ; -5016,4161 -4816,4161 ; -3076,-4164 -3076,-3964 ; -3076,6736 -3076,6936 ; -1141,-4164 -1141,-3964 ; -1141,6736 -1141,6936 ; 794,-4164 794,-3964 ; 794,6736 794,6936 ; 2734,-4164 2734,-3964 ; 2734,6736 2734,6936 ; 4669,-4164 4669,-3964 ; 4669,6736 4669,6936 ; 5784,-3664 10284,-3664 ; 5784,-3364 10284,-3364 ; 6604,-4164 6604,-3964 ; 6604,6736 6604,6936 ; 7284,-3964 7284,-3364 7284,-3064 5784,-3064 5784,-3964 ; 8544,-4164 8544,-3964 ; 8544,6736 8544,6936 ; 9384,-3964 9384,-3364 ; 10284,-3064 4384,-3064 4384,-3964 5784,-3964 ; 10284,-2764 10284,-3964 ; 10284,-1389 10484,-1389 ; 10284,1386 10484,1386 ; 10284,4161 10484,4161 ; 5784,-3964 10284,-3964 ; 10284,-3964 10284,6736 -4816,6736 -4816,-3964 10284,-3964 ; -5016,-4164 10484,-4164 10484,6936 -5016,6936 -5016,-4164
  text "1" at -4069.66,6801 h60
  text "2" at -2139,6801 h60
  text "3" at -199.66,6801 h60
  text "4" at 1741,6801 h60
  text "5" at 3681,6801 h60
  text "6" at 5611,6801 h60
  text "7" at 7561,6801 h60
  text "8" at 9491,6801 h60
  text "A" at -4941,5463 h60
  text "A" at 10359,5463 h60
  text "B" at -4941,2683 h60
  text "B" at 10359,2683 h60
  text "C" at -4941,-97 h60
  text "C" at 10359,-97 h60
  text "D" at -4941,-2857 h60
  text "D" at 10359,-2857 h60
  text "PCB DESIGNER:" at 5834,-3159 h60
  text "TITLE:" at 7384,-3164 h60
  text "Michael Jones" at 5899,-3294 h60
  text "Group VIII Technology" at 4624,-3394 h60
  text "DATE:" at 5834,-3464 h60
  text "PART NO.:" at 7334,-3464 h60
  text "REV:" at 9434,-3464 h60
  text "1652 W 820 N" at 4624,-3494 h60
  text ".PRINT_DATE" at 5884,-3584 h60
  text "Provo, UT 84601" at 4624,-3594 h60
  text "801/379-0118" at 4624,-3694 h60
  text "FILE NAME:" at 5834,-3764 h60
  text "DWG NO:" at 7334,-3764 h60
  text "SCALE:" at 9434,-3764 h60
  text ".PCB_FILE_NAME_NO_PATH" at 5884,-3884 h60
  text "1" at -4069.66,-4099 h60
  text "2" at -2139,-4099 h60
  text "3" at -199.66,-4099 h60
  text "4" at 1741,-4099 h60
  text "5" at 3681,-4099 h60
  text "6" at 5611,-4099 h60
  text "7" at 7561,-4099 h60
  text "8" at 9491,-4099 h60